# Altium PCB dolinepcb.PcbDoc
Units mil, origin at the board's own origin, x right, y up, seen from the top; angles counter-clockwise.
Board outline 3070 x 3025 mil, 2 copper layers (Top Layer, Bottom Layer); 26 components, 41 nets, 128 pads, 2 vias.
Unrouted connection lines stored in the file: 1.
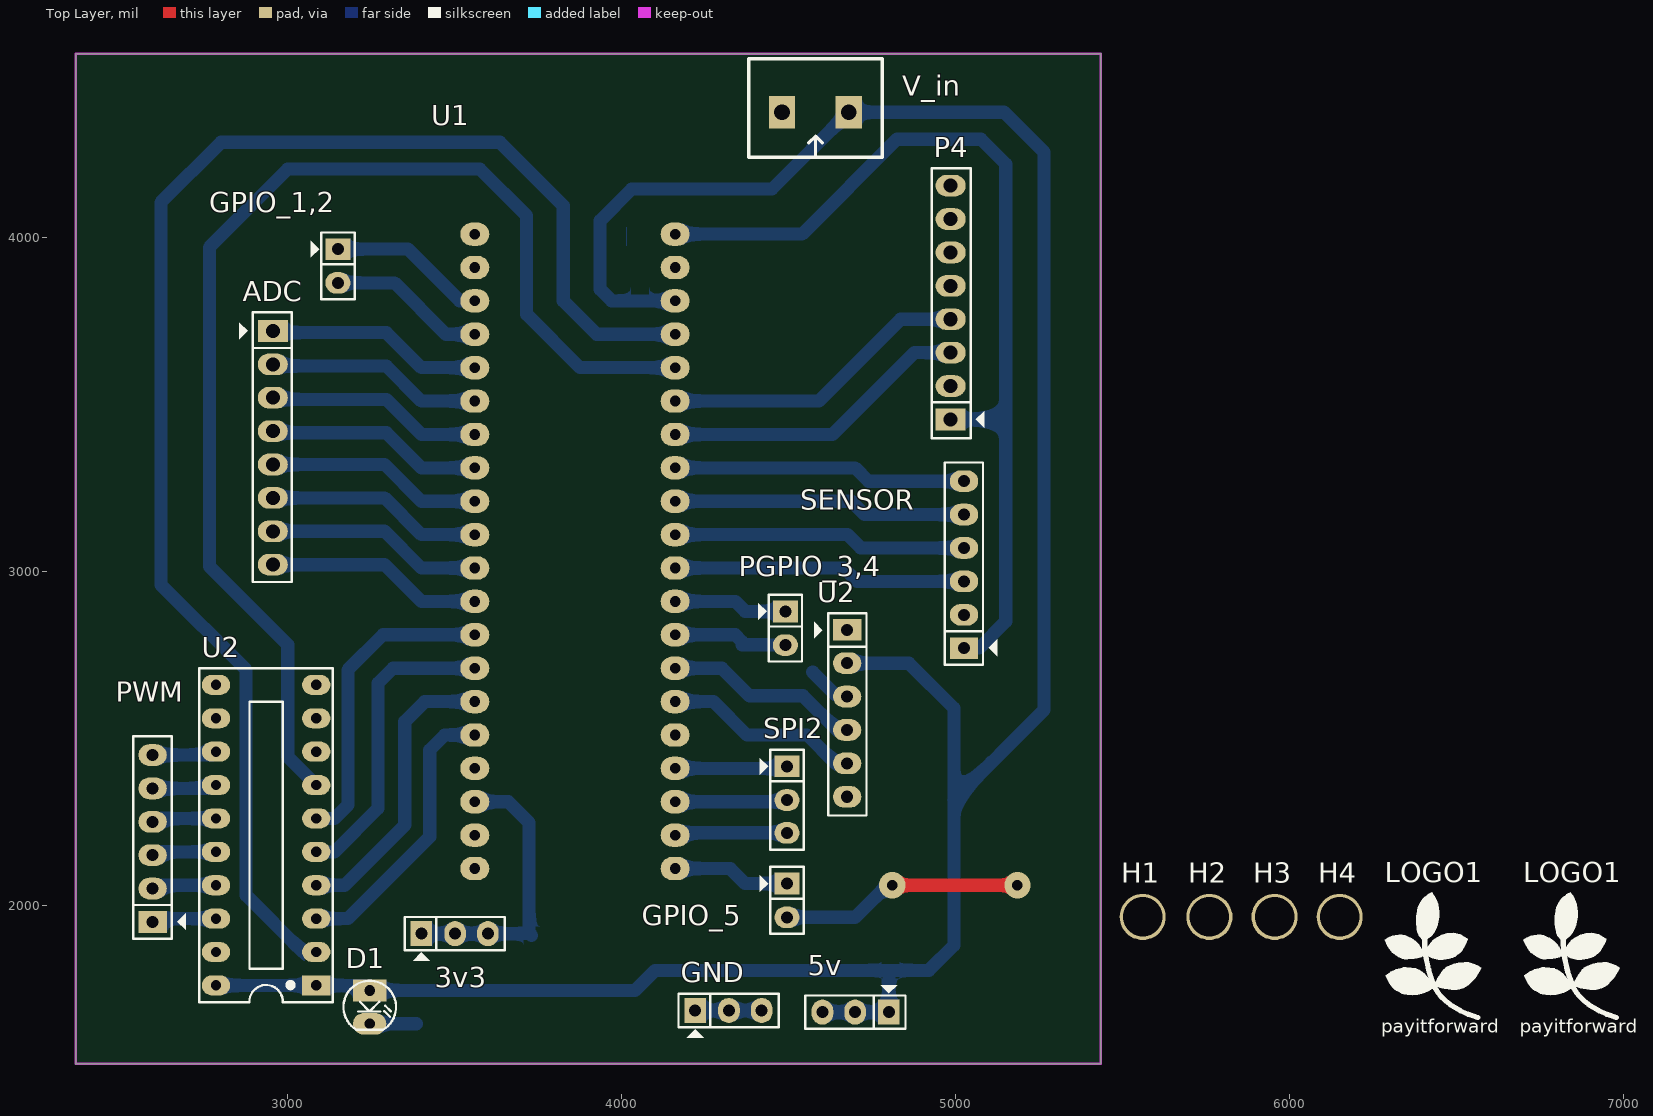
[diagram p0: Top Layer view]
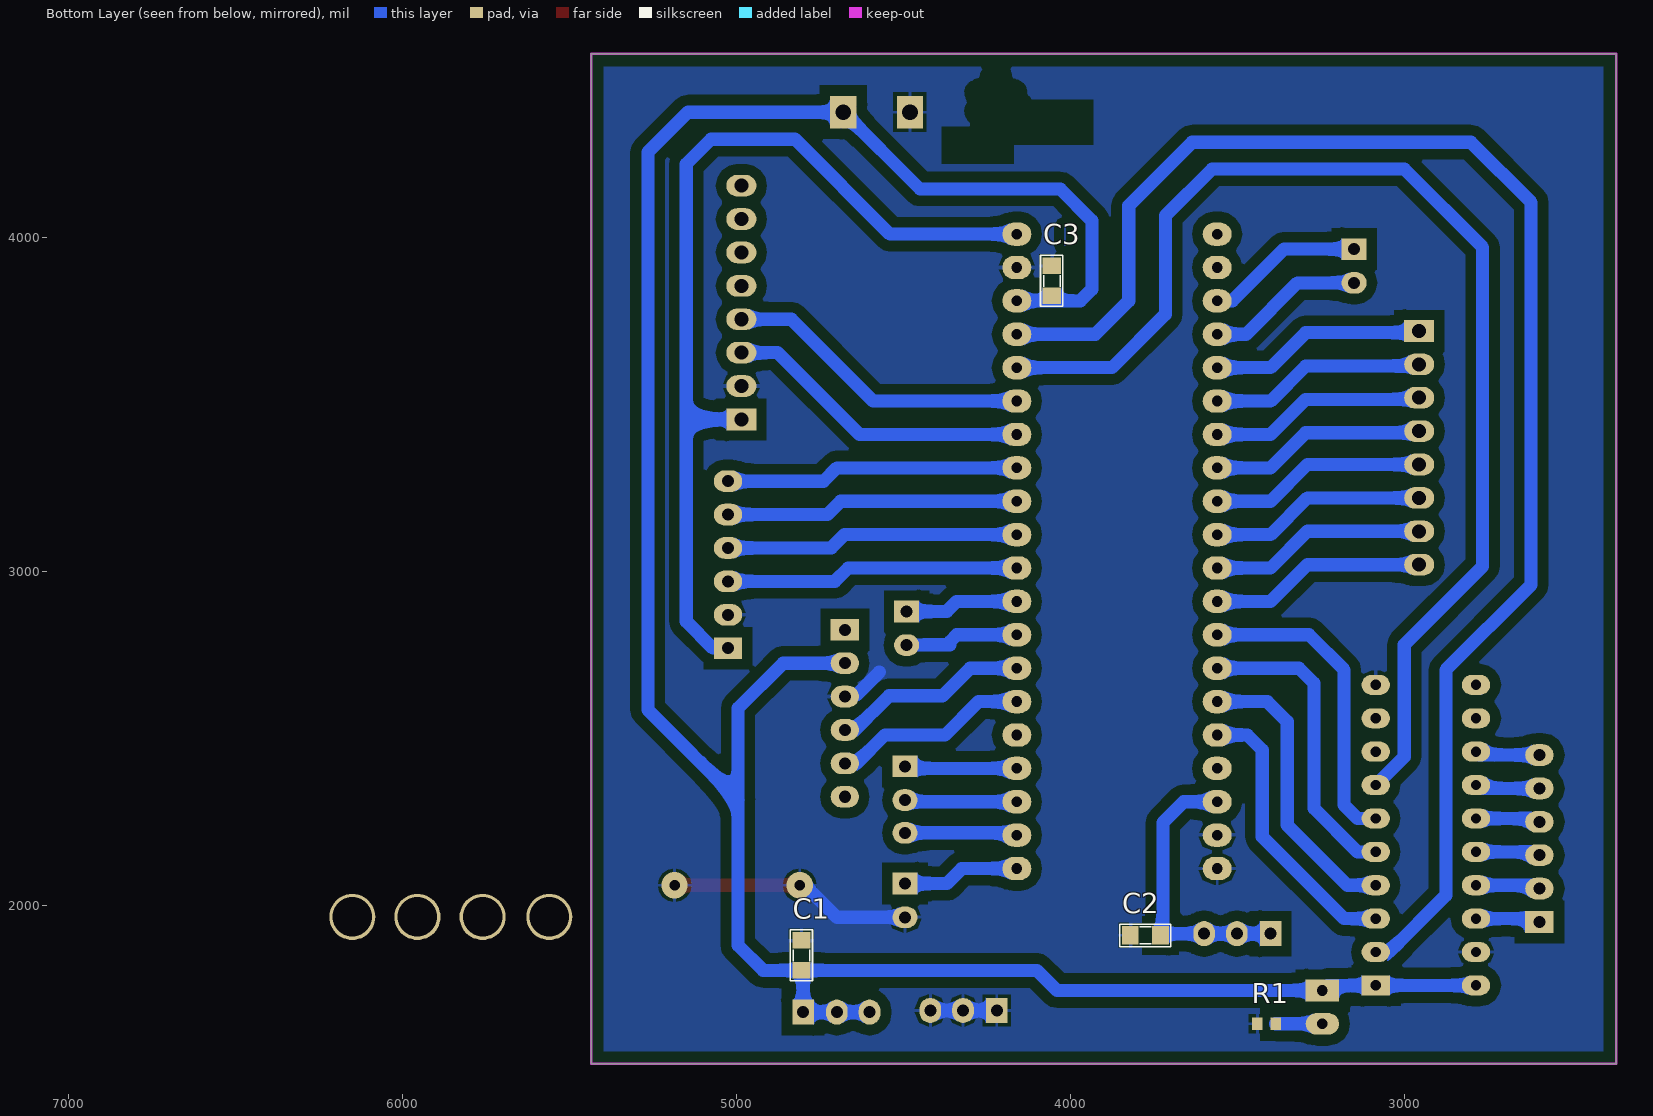
[diagram p1: Bottom Layer view, seen from below]

## Layer stack, top to bottom
Top Solder: solder mask 0.4, Solder Resist, Dk 3.5
Top Layer: signal copper 1.4
Dielectric 1: dielectric 12.6, FR-4, Dk 4.8
Bottom Layer: signal copper 1.4
Bottom Solder: solder mask 0.4, Solder Resist, Dk 3.5

## Board outline
2365,2885 2365,4550 5435,4550 5435,1525 2365,1525

## Design rules (kind name [scope] priority, off if disabled: settings)
Clearance [All] p1: gap=31.5 ignorepadtopadclearanceinfootprint=FALSE
PolygonConnect [All] p1: connectstyle=Relief reliefconductorwidth=10 reliefentries=4 polygonreliefangle="90 Angle" airgapwidth=10
RoutingVias [All] p1: holewidth=28 width=50 viastyle="Through Hole" minholewidth=28 minwidth=50 maxholewidth=28 maxwidth=50
SolderMaskExpansion [All] p1: expansion=4
Width Width_1 [All] p1: maxlimit=39.37 minlimit=39.37 preferedwidth=39.37
Width [All] p2: maxlimit=19.68 minlimit=19.68 preferedwidth=19.68 minimp=50.000000 maximp=50.000000 favimp=50.000000
30 further rules are at their usual default settings.

## Classes and differential pairs
component class dolinesch: 3v3 5v ADC C1 C2 C3 D1 GND GPIO_1,2 GPIO_5 H1 H2 H3 H4 LOGO1 P4 PGPIO_3,4 PWM R1 SENSOR SPI2 U1 U2 V_in

## Components (designator, comment, footprint, x,y, rotation, side; value= is the part's Value field where it differs from the comment)
3v3 "Header 3" JP3 3500,1915 r0 top
5v "Header 3" JP3 4700,1680 r180 top
ADC "Header 8" JP8 2955,3720 r270 top
C1 "Cap Non-Pol SMD" CAP-SM-0805 4805,1895 r270 bottom value=100uF
C2 "Cap Non-Pol SMD" CAP-SM-0805 3820,1910 r180 bottom value=100nF
C3 "Cap Non-Pol SMD" CAP-SM-0805 4055,3915 r270 bottom value=100nF
D1 "LED" LED-3mm 3245,1745 r270 top
GND "Header 3" JP3 4320,1685 r0 top
GPIO_1,2 "Header 2" JP2 3150,3965 r270 top
GPIO_5 "Header 2" JP2 4495,2065 r270 top
H1 "Hole" "LO KHOAN 3MM" 5560,1965 r0 top
H2 "Hole" "LO KHOAN 3MM" 5760,1965 r0 top
H3 "Hole" "LO KHOAN 3MM" 5955,1965 r0 top
H4 "Hole" "LO KHOAN 3MM" 6150,1965 r0 top
LOGO1 "LOGO PIF" "PIF LOGO TOP OVERLAY" 6590,1585 r0 top
LOGO1 "LOGO PIF" "PIF LOGO TOP OVERLAY" 6175,1585 r0 top
P4 "Header 8" JP8 4985,3455 r90 top
PGPIO_3,4 "Header 2" JP2 4490,2880 r270 top
PWM "Header 6" JP6 2595,1950 r90 top
R1 "RESISTOR SMD" RES-SM-0603 3385,1645 r0 bottom value=1K
SENSOR "Header 6" JP6 5025,2770 r90 top
SPI2 "Header 3" JP3 4495,2316 r270 top
U1 "STM32F103 BLUEPILL" "STM32F103 Bluepill" 3560,2110 r0 top
U2 "HC 05" JP6 4675,2825 r270 top
U2 "74HC245" DIP20/W0.3 3085,1760 r90 top
V_in "Domino 2" "DOMINO 2- 5mm" 4580,4375 r180 top

## Footprints (in the part's own frame and the unit in brackets; to place one, negate y for a bottom-side part, rotate by r counter-clockwise, add the part's x,y. Pads: shape width x height; smd on the part's side, far side on the other; paste and mask are expansions set on the pad)
CAP-SM-0805 [mil]
  rect 50x55 smd: 1(0,0) 2(90,0)
  silkscreen extent -32,-34 121,33, body extent 6,-25 84,25, height 31
DIP20/W0.3 [mil] "DIP 20, 20 PIN, W 300mil, Pin to pin 100mil"
  rect 60x85 hole 31: 1(0,0)
  oval 60x85 hole 31: 2(100,0) 3(200,0) 4(300,0) 5(400,0) 6(500,0) 7(600,0) 8(700,0) 9(800,0) 10(900,0) 11(900,300) 12(800,300) 13(700,300) 14(600,300) 15(500,300) 16(400,300) 17(300,300) 18(200,300) 19(100,300) 20(0,300)
  silkscreen extent -50,-50 950,350, body extent -91,-18 945,322, height 155
"DOMINO 2- 5mm" [mm]
  rect 2x2.5 hole 1.2: 1(-2.54,0) 2(2.54,0)
  silkscreen extent -5.08,-4.08 5.08,3.43, body extent -5,-4.07 5,3.43, height 10
JP2 [mil]
  rect 65x75 hole 36: 1(0,0)
  oval 65x75 hole 36: 2(101,0)
  silkscreen extent -50,-81 150,50, body extent -48,-50 148,48, height 323
JP3 [mil] "Jumper 3"
  rect 65x75 hole 36: 1(-100,0)
  oval 65x75 hole 36: 2(1,0) 3(99,0)
  silkscreen extent -150,-81 150,50, body extent -150,-60 150,55, height 355
JP6 [mil] "JP6"
  rect 65x85 hole 36: 1(0,0)
  oval 65x85 hole 36: 2(100,0) 3(200,0) 4(300,0) 5(400,0) 6(500,0)
  silkscreen extent -50,-99 556,58, body extent -48,-50 548,48, height 323
JP8 [mil] "JP8"
  rect 65x90 hole 42: 1(0,0)
  oval 65x90 hole 42: 2(100,0) 3(200,0) 4(300,0) 5(400,0) 6(500,0) 7(600,0) 8(700,0)
  silkscreen extent -56,-100 752,57, body extent -48,-50 748,48, height 323
LED-3mm [mil] "LED 2 PIN, 3ly Only colour"
  rect 65x100 hole 32: 1(0,0)
  oval 65x100 hole 32: 2(100,0)
  silkscreen extent -29,-78 118,79, body extent -25,-75 113,75, height 217
"LO KHOAN 3MM" [mil]
  round 138 hole 118.1: 1(0,0)
"PIF LOGO TOP OVERLAY" [mil]
  silkscreen extent 110,79 399,454
RES-SM-0603 [mm]
  rect 0.8x0.95 smd: 1(-0.014,0) 2(1.386,0)
  body extent -0.11,-0.4 1.49,0.4, height 0.3
"STM32F103 Bluepill" [mil]
  oval 86.61x70 hole 32: 1(0,1900) 2(0,1800) 3(0,1700) 4(0,1600) 5(0,1500) 6(0,1400) 7(0,1300) 8(0,1200) 9(0,1100) 10(0,1000) 11(0,900) 12(0,800) 13(0,700) 14(0,600) 15(0,500) 16(0,400) 17(0,300) 18(0,200) 19(0,100) 20(0,0) 21(600,0) 22(600,100) 23(600,200) 24(600,300) 25(600,400) 26(600,500) 27(600,600) 28(600,700) 29(600,800) 30(600,900) 31(600,1000) 32(600,1100) 33(600,1200) 34(600,1300) 35(600,1400) 36(600,1500) 37(600,1600) 38(600,1700) 39(600,1800) 40(600,1900)
  body extent -141,-113 745,2196, height 571

## Part data
3v3 5v GND SPI2: "Header, 3-Pin", LatestRevisionDate=17-Jul-2002, LatestRevisionNote="Re-released for DXP Platform.", Publisher="Altium Limited"
ADC P4: "Header, 8-Pin", LatestRevisionDate=17-Jul-2002, LatestRevisionNote="Re-released for DXP Platform.", Publisher="Altium Limited"
C1 C2 C3: "Capacitor"
GPIO_1,2 GPIO_5 PGPIO_3,4: "Header, 2-Pin", LatestRevisionDate=17-Jul-2002, LatestRevisionNote="Re-released for DXP Platform.", Publisher="Altium Limited"
H1 H2 H3 H4: "Hole 3mm"
LOGO1 LOGO1: library part "LOGO PIF_2"
PWM SENSOR: "Header, 6-Pin", LatestRevisionDate=17-Jul-2002, LatestRevisionNote="Re-released for DXP Platform.", Publisher="Altium Limited"
R1: "Resistor"
U2: "Octal bus tranceiver"
V_in: "Domino, 2-Pin", LatestRevisionDate=17-Jul-2002, LatestRevisionNote="Re-released for DXP Platform.", Publisher="Altium Limited"

## Via types
v1: diameter 78.74, hole 31.5, Top Layer to Bottom Layer, 2 vias

## Nets (pads, with @x,y where several pads share a name; then routed paths per layer and width w, separated by ;. In a path a pad name is that pad's centre, name@x,y a point inside that pad or via, vN(x,y) a via of type N, cw(c..) or ccw(c..) an arc to the next point about the centre after c; other vN are vias at no path point)
+3v3: P4.1 SENSOR.1 U1.40 | length 2831.5
  Bottom Layer w39.37: U1.40 4540,4010 4824.13,4294.13 5075.87,4294.13 5150,4220 5150,3455 ; P4.1 5150,3455 ; SENSOR.1 5070,2770 5150,2850 5150,3455
+3v3x: 3v3.1 3v3.2 3v3.3 C2.2 U1.18 | length 854
  Bottom Layer w39.37: 3v3.1 3v3.2 3v3.3 C2.2@3725,1915 ; U1.18 3660,2310 3722.5,2247.5 3722.5,1917.5 C2.2@3725,1915 ; C2.2 C2.2@3725,1915
+5v: 5v.1 5v.2 5v.3 C1.2 C3.2 D1.1 U1.38 U2.1@3085,1760 U2.2@4675,2725 U2.20 V_in.1 | length 7694.8
  Bottom Layer w39.37: U2.20 3085,1760 3230,1760 D1.1 4040,1745 4100,1805 C1.2 ; U1.38 3970,3810 3935,3845 3935,4050 4030,4145 4450,4145 V_in.1 5145,4375 5265,4255 5265,2585 4995,2315 ; 5v.3 5v.2 5v.1 4800,1800 C1.2 ; U2.2@4675,2725 4860,2725 4995,2590 4995,2315 ; C1.2 4920,1805 4995,1880 4995,2315
ADC0: ADC.1 U1.5 | length 664.7
  Bottom Layer w39.37: ADC.1 2960,3715 3295,3715 3400,3610 U1.5 U1.5@3550,3600
ADC1: ADC.2 U1.6 | length 664.7
  Bottom Layer w39.37: ADC.2 2960,3615 3295,3615 3400,3510 U1.6 U1.6@3550,3500
ADC2: ADC.3 U1.7 | length 664.7
  Bottom Layer w39.37: ADC.3 2960,3515 3295,3515 3400,3410 U1.7 U1.7@3550,3400
ADC3: ADC.4 U1.8 | length 664.7
  Bottom Layer w39.37: ADC.4 2960,3415 3295,3415 3400,3310 U1.8 U1.8@3550,3300
ADC4: ADC.5 U1.9 | length 650.6
  Bottom Layer w39.37: ADC.5 3290,3320 3400,3210 U1.9
ADC5: ADC.6 U1.10 | length 650.6
  Bottom Layer w39.37: ADC.6 3290,3220 3400,3110 U1.10
ADC6: ADC.7 U1.11 | length 650.6
  Bottom Layer w39.37: ADC.7 3290,3120 3400,3010 U1.11
ADC7: ADC.8 U1.12 | length 650.6
  Bottom Layer w39.37: ADC.8 3290,3020 3400,2910 U1.12
GND: C1.1 C2.1 C3.1 GND.1 GND.2 GND.3 GPIO_5.2 P4.2 R1.2 SENSOR.2 U1.19 U1.20 U1.39 U2.3@4675,2625 U2.10 U2.19 V_in.2 | length 1065.6
  Top Layer w39.37: v1(4810,2060) v1(5185,2060)
  Bottom Layer w39.37: GND.1 GND.2 GND.3 ; GPIO_5.2 4699,1964 4795,2060 v1(4810,2060) ; 4571.85,2698.37 4639.66,2630.56 4675,2630.56 U2.3@4675,2625
GPIO1: GPIO_1,2.1 U1.3 | length 474.2
  Bottom Layer w39.37: 3150,3965 3360,3965 3515,3810 U1.3
GPIO2: GPIO_1,2.2 U1.4 | length 473.8
  Bottom Layer w39.37: 3150,3864 3319.58,3864 3473.58,3710 U1.4
GPIO3: PGPIO_3,4.1 U1.29 | length 342.4
  Bottom Layer w39.37: U1.29 4340,2910 4370,2880 4490,2880
GPIO4: PGPIO_3,4.2 U1.28 | length 348.7
  Bottom Layer w39.37: U1.28 4340,2810 4360,2790 4360,2780 4438,2780 4439,2779 4490,2779
GPIO5: GPIO_5.1 U1.21 | length 353.6
  Bottom Layer w39.37: U1.21 4325,2110 4370,2065 GPIO_5.1
IN1: U1.16 U2.3@3085,1960 | length 855.1
  Bottom Layer w39.37: U2.3@3085,1960 3180,1960 3425,2205 3425,2465 3470,2510 U1.16
IN2: U1.15 U2.4@3085,2060 | length 884.4
  Bottom Layer w39.37: U2.4@3085,2060 3170,2060 3350,2240 3350,2550 3410,2610 U1.15
IN3: U1.14 U2.5@3085,2160 | length 922.5
  Bottom Layer w39.37: U2.5@3085,2160 3140,2160 3270,2290 3270,2665 3315,2710 U1.14
IN4: U1.13 U2.6@3085,2260 | length 940.1
  Bottom Layer w39.37: U2.6@3085,2260 3140,2260 3180,2300 3180,2705 3285,2810 U1.13
IS1: SENSOR.3 U1.30 | length 881.6
  Bottom Layer w39.37: U1.30 4665,3010 4705,2970 SENSOR.3
IS2: SENSOR.4 U1.31 | length 882.9
  Bottom Layer w39.37: U1.31 4676.36,3110 4715.68,3070.68 4715,3070 SENSOR.4
IS3: SENSOR.5 U1.32 | length 881.6
  Bottom Layer w39.37: U1.32 4687.71,3210 4727.71,3170 SENSOR.5
IS4: SENSOR.6 U1.33 | length 881.6
  Bottom Layer w39.37: U1.33 4699.07,3310 4739.07,3270 SENSOR.6
NetD1_2: D1.2 R1.1 | length 139.4
  Bottom Layer w39.37: D1.2 R1.1
NetPWM_1: PWM.1 U2.18 | length 194.1
  Bottom Layer w39.37: PWM.1 2605,1960 U2.18
NetPWM_2: PWM.2 U2.17 | length 194.1
  Bottom Layer w39.37: PWM.2 2605,2060 U2.17
NetPWM_3: PWM.3 U2.16 | length 194.1
  Bottom Layer w39.37: PWM.3 2605,2160 U2.16
NetPWM_4: PWM.4 U2.15 | length 194.1
  Bottom Layer w39.37: PWM.4 2605,2260 U2.15
NetPWM_5: PWM.5 U2.14 | length 194.1
  Bottom Layer w39.37: PWM.5 2775,2350 U2.14
NetPWM_6: PWM.6 U2.13 | length 194.1
  Bottom Layer w39.37: PWM.6 2775,2450 U2.13
PWM1: U1.36 U2.7 | length 3654.2
  Bottom Layer w39.37: U2.7 3000,2445 3000,2780 2765,3015 2765,3970 3000,4205 3575,4205 3715,4065 3715,3770 3875,3610 U1.36
PWM2: U1.37 U2.2@3085,1860 | length 4480.7
  Bottom Layer w39.37: U2.2@3085,1860 3045,1860 2875,2030 2875,2705 2620,2960 2620,4105 2800,4285 3635,4285 3825,4095 3825,3810 3925,3710 U1.37
RX1: U1.27 U2.4@4675,2525 | length 591.6
  Bottom Layer w39.37: U1.27 4300,2710 4382.5,2627.5 4542.5,2627.5 4645,2525 U2.4@4675,2525
SCL: P4.3 U1.34 | length 926.5
  Bottom Layer w39.37: U1.34 4631.42,3410 4876.42,3655 P4.3
SDA: P4.4 U1.35 | length 926.5
  Bottom Layer w39.37: U1.35 4590,3510 4835,3755 P4.4
SPI2_MISO: SPI2.2 U1.23 | length 337.1
  Bottom Layer w39.37: U1.23 4490,2310 SPI2.2
SPI2_MOSI: SPI2.1 U1.24 | length 337.5
  Bottom Layer w39.37: U1.24 4489,2410 SPI2.1
SPI2_SCK: SPI2.3 U1.22 | length 337.9
  Bottom Layer w39.37: U1.22 4167,2217 SPI2.3
TX1: U1.26 U2.5@4675,2425 | length 591.6
  Bottom Layer w39.37: U1.26 4275,2610 4375,2510 4555,2510 4640,2425 U2.5@4675,2425
pads on no net: H1.1 H2.1 H3.1 H4.1 P4.5 P4.6 P4.7 P4.8 U1.1 U1.2 U1.17 U1.25 U2.1@4675,2825 U2.6@4675,2325 U2.8 U2.9 U2.11 U2.12
copper on no net: | length 83.3
  Bottom Layer w0: 4015,3975 4015,4030
  Bottom Layer w39.37: 2775,2550 2785,2560 ; 2775,2650 2785,2660

## Polygon pours and split planes (outlines as drawn)
GND on Bottom Layer "GND_L02_P034" (solid, pour order 34): 2365,4550 5435,4550 5435,1525 2365,1525
GND on Bottom Layer "GND_L02_P026" (solid, pour order 26): 5670,2875
GND on Bottom Layer "GND_L02_P010" (solid, pour order 10): 2380,4550

## Keep-outs
Keep-Out Layer:
  the board outline again, w7.87

## Text inside footprints (layer, text, board x,y; h text height)
LOGO1: Top Overlay "payitforward" at 6690,1605 h70
LOGO1: Top Overlay "payitforward" at 6275,1605 h70